# EAGLE board qwiic_blower-Panel (EAGLE 9.5.2)
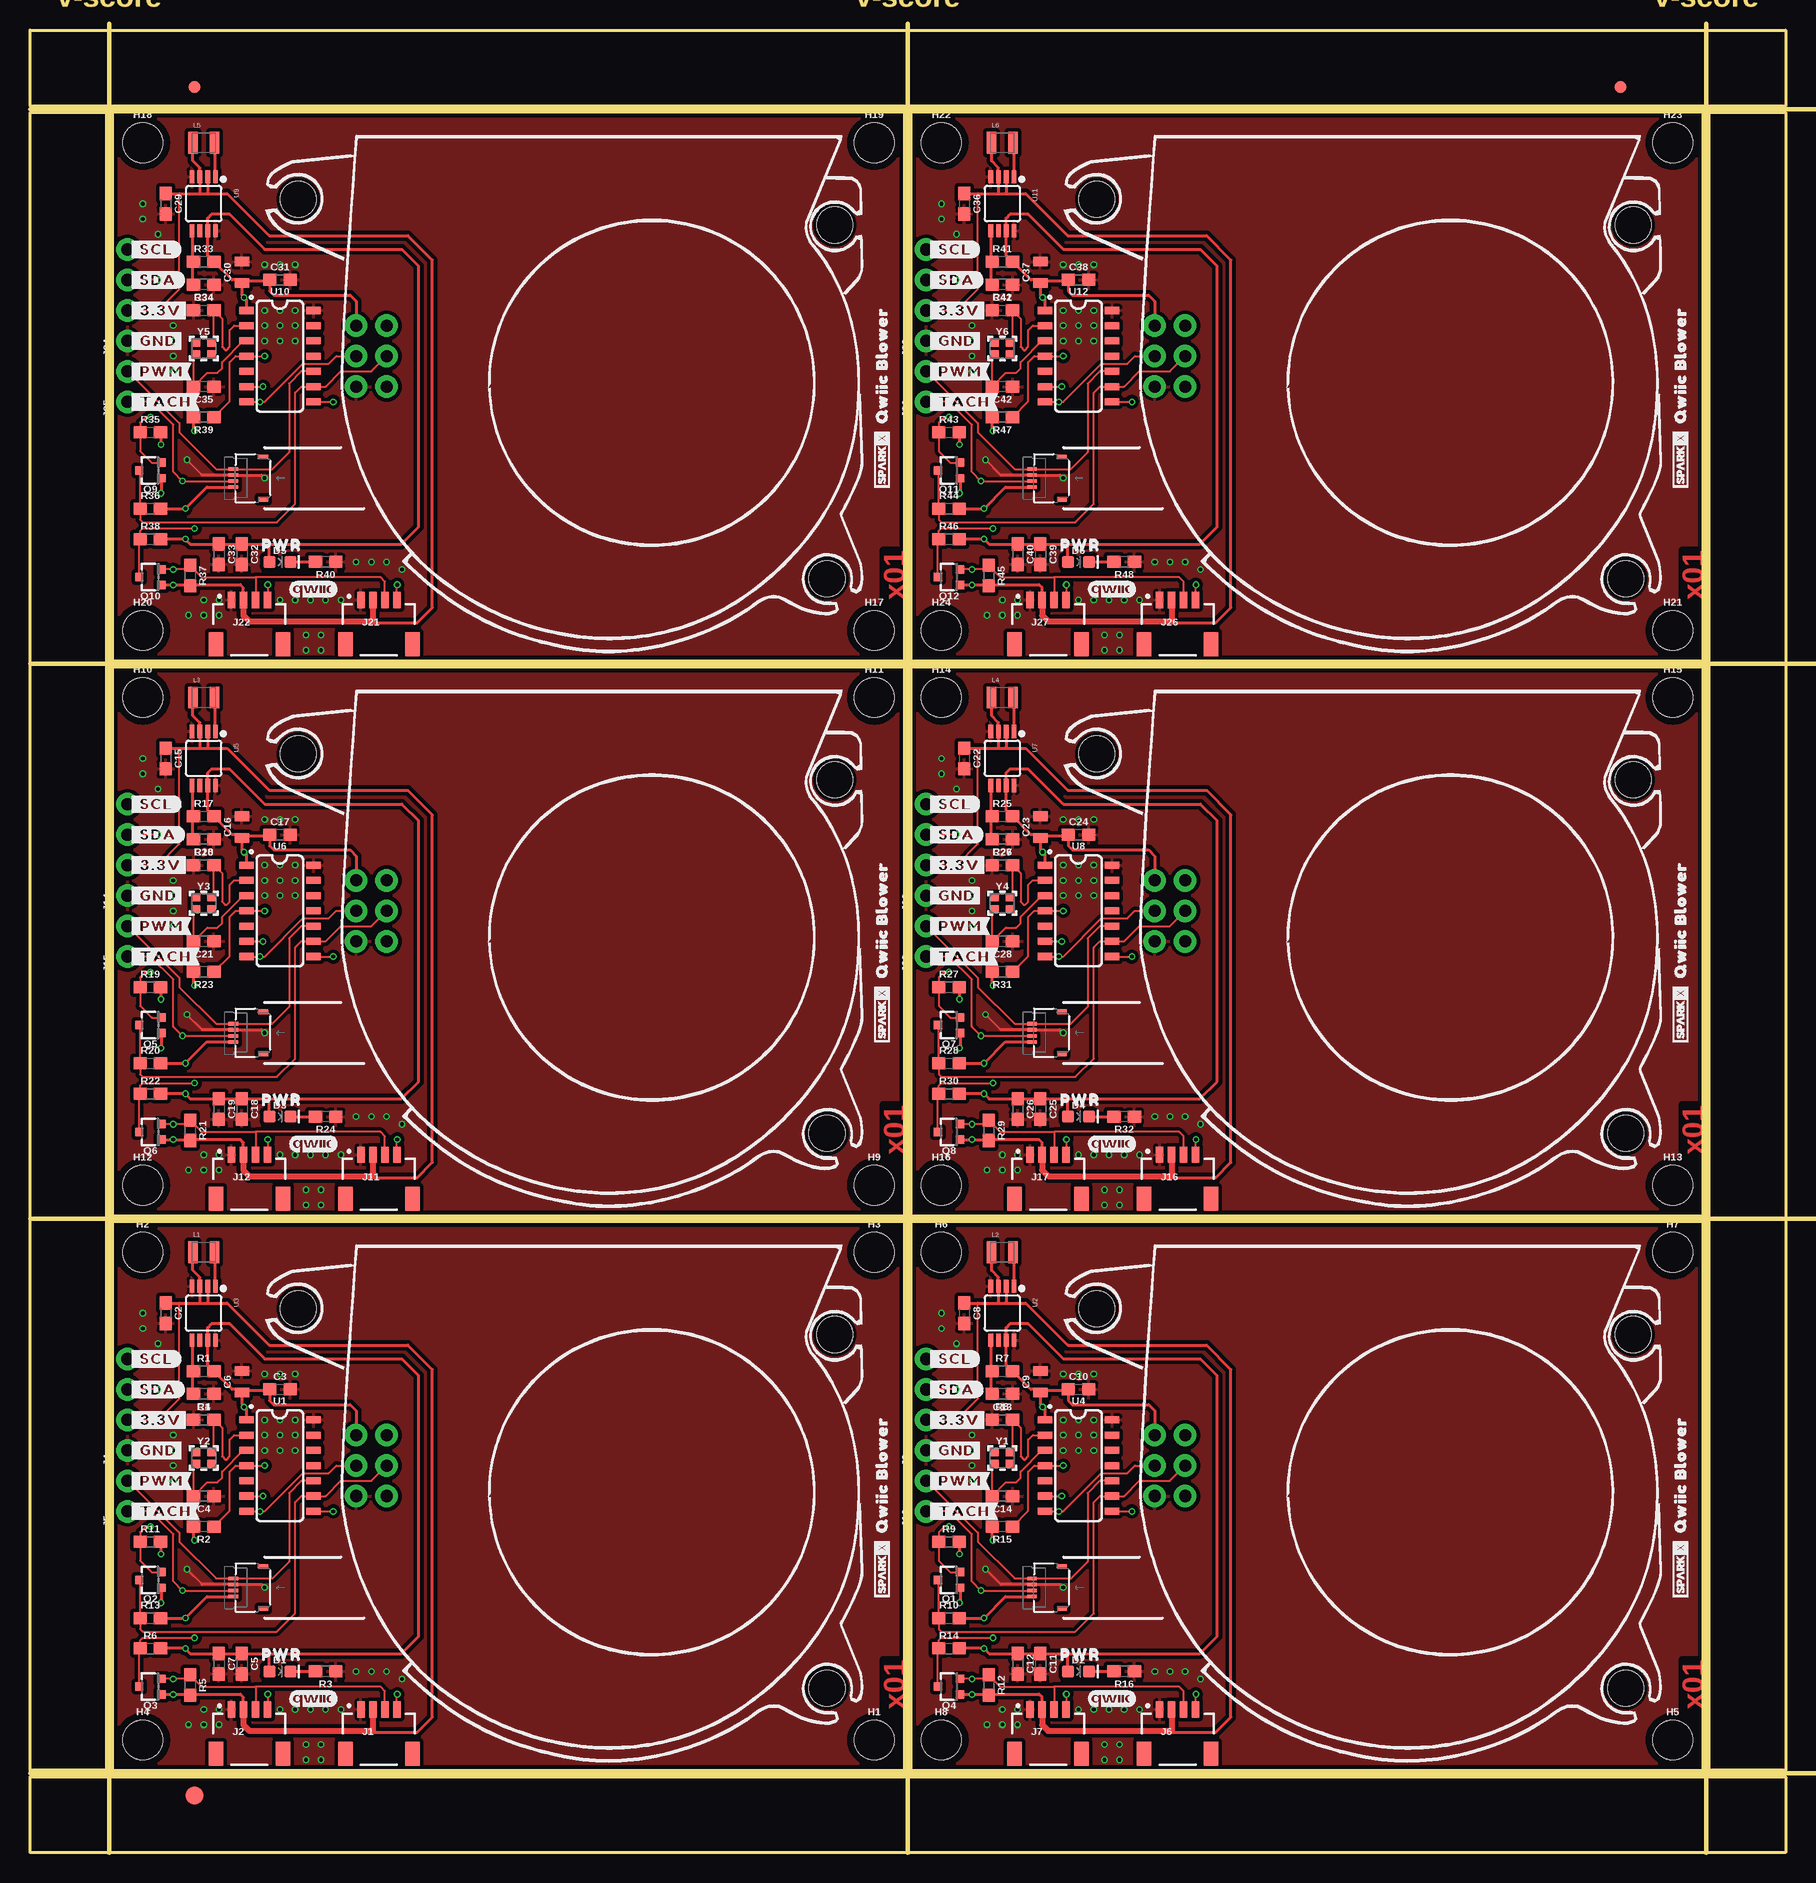
[diagram p0: board, top side]
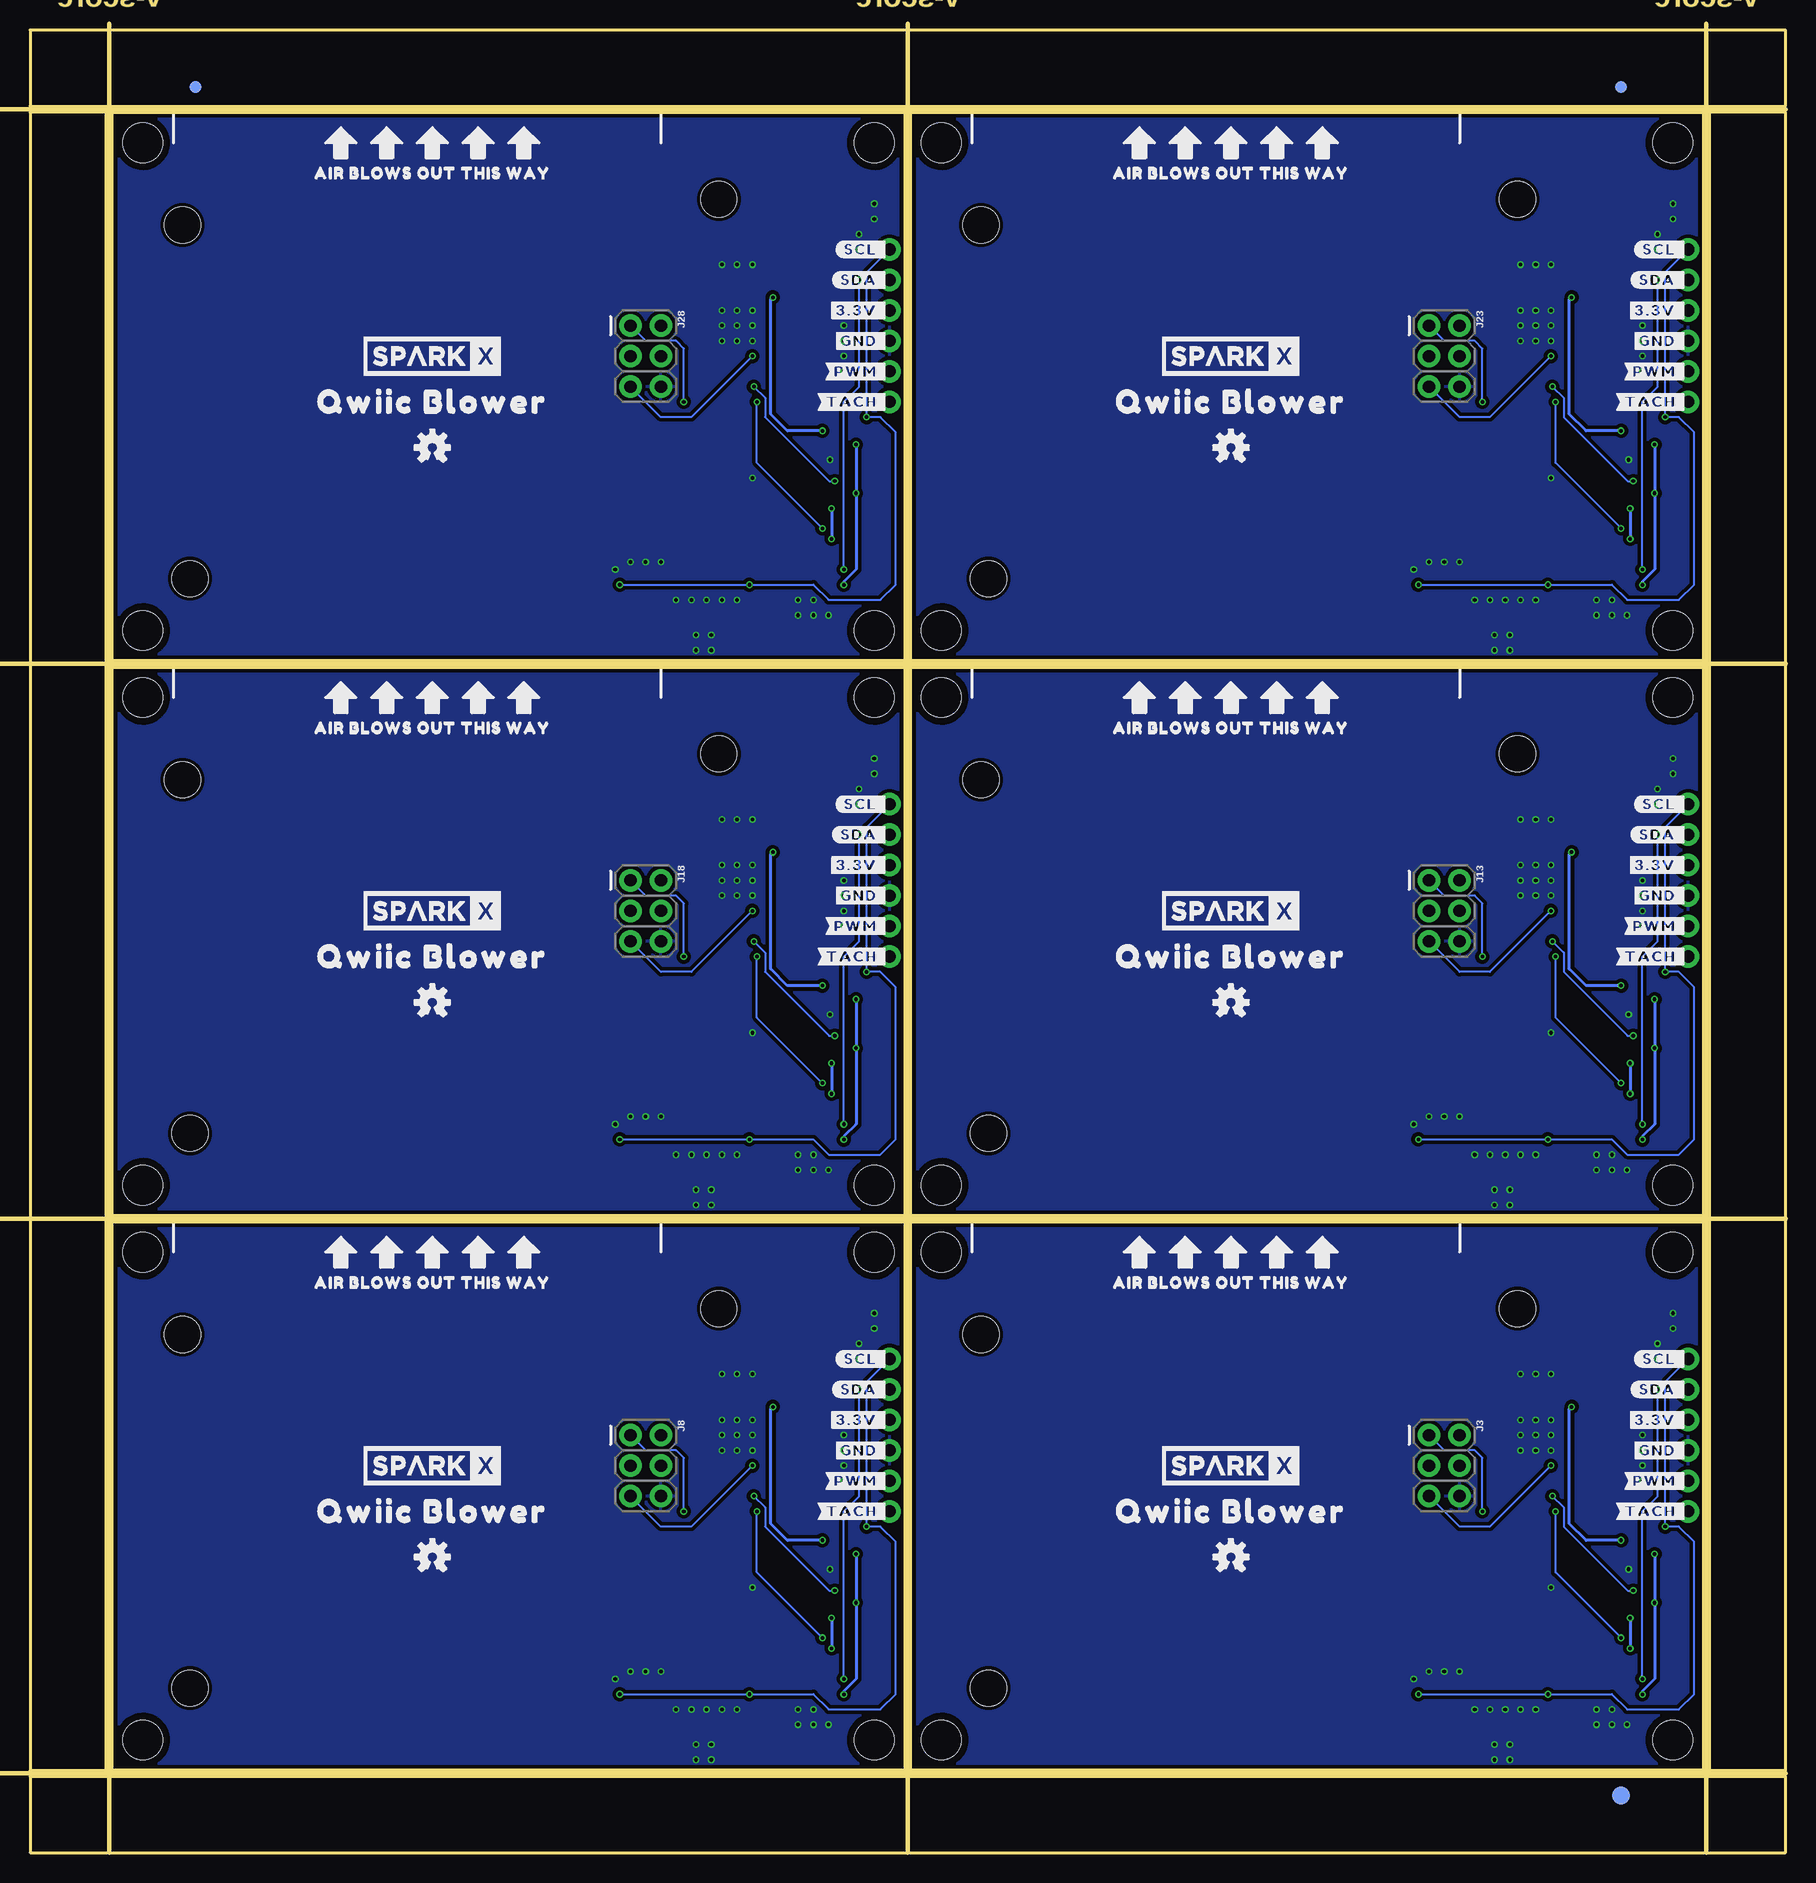
[diagram p1: board, bottom side, seen from below]

Size 146.3 x 151.89 mm. Coordinates in mm from the lower left corner, seen from the top.
Outline: 6.86,6.86 72.9,6.86 72.9,52.58 6.86,52.58 6.86,6.86
Outline: 73.41,6.86 139.45,6.86 139.45,52.58 73.41,52.58 73.41,6.86
Outline: 6.86,53.09 72.9,53.09 72.9,98.81 6.86,98.81 6.86,53.09
Outline: 73.41,53.09 139.45,53.09 139.45,98.81 73.41,98.81 73.41,53.09
Outline: 6.86,99.31 72.9,99.31 72.9,145.03 6.86,145.03 6.86,99.31
Outline: 73.41,99.31 139.45,99.31 139.45,145.03 73.41,145.03 73.41,99.31
Outline: 0,6.35 146.3,6.35 146.3,0 0,0 0,6.35
Outline: 139.95,145.03 146.3,145.03 146.3,6.86 139.95,6.86 139.95,145.03
Outline: 0,151.89 146.3,151.89 146.3,145.54 0,145.54 0,151.89
Outline: 0,145.03 6.35,145.03 6.35,6.86 0,6.86 0,145.03
Copper layers (1*16): Top 0.035mm / dielectric 1.5mm / Bottom 0.035mm
Design rules "qwiic_blower": minimum track width 5mil, minimum drill 0.3mm, track to track 5mil, track to pad 5mil, pad to pad 5mil, via to via 5mil, smd to smd 5mil, copper to edge 7mil, drill to drill 7mil, minimum pad ring 5mil, minimum via ring 5mil, stop-mask expansion 4mil, vias tented up to drill 25mil, thermal gap 10mil
Net classes: 1 power: width 0.203 mm
Milling: 7 lines

## Footprints (pad centres in the part's own frame; a part is rotated, then mirrored left to right if it is on the bottom)
0603 = smd 1.1 x 1: 1 -0.85,0; 2 0.85,0
0805 = smd 0.8 x 1.2: 1 -0.9,0; 2 0.9,0
LED-0603 = smd 1 x 1: A -0.877,0; C 0.877,0
FIDUCIAL-1X2 = smd 1 x 1: 1 0,0
FIDUCIAL-1.5X3 = smd 1.5 x 1.5: 1 0,0
STAND-OFF = hole 3.302: 0,0
JST04_1MM_RA = smd 0.6 x 1.35: 1 -1.5,0; 2 -0.5,0; 3 0.5,0; 4 1.5,0 | smd 1.2 x 2: NC1 2.8,-3.675; NC2 -2.8,-3.675
2X3-NS = drill 1.016 pad 1.88: 1 -2.54,-1.27; 2 -2.54,1.27; 3 0,-1.27; 4 0,1.27; 5 2.54,-1.27; 6 2.54,1.27
1X04_NO_SILK = drill 1.016 pad 1.88: 1 0,0; 2 2.54,0; 3 5.08,0; 4 7.62,0
1X02_NO_SILK = drill 1.016 pad 1.88: 1 0,0; 2 2.54,0
0806 = smd 0.8 x 1.8: 1 -0.9,0; 2 0.9,0
SOT323 = smd 0.7 x 0.7: 1 -0.65,-0.925; 2 0.65,-0.925; 3 0,0.925
SO14 = smd 0.6 x 1.2: 1 -3.81,-2.8; 2 -2.54,-2.8; 3 -1.27,-2.8; 4 0,-2.8; 5 1.27,-2.8; 6 2.54,-2.8; 7 3.81,-2.8; 8 3.81,2.8; 9 2.54,2.8; 10 1.27,2.8; 11 0,2.8; 12 -1.27,2.8; 13 -2.54,2.8; 14 -3.81,2.8
MSOP8 = smd 0.4 x 1.1: 1 -0.975,-2.25; 2 -0.325,-2.25; 3 0.325,-2.25; 4 0.975,-2.25; 5 0.975,2.25; 6 0.325,2.25; 7 -0.325,2.25; 8 -0.975,2.25
FPC_4_0.5MM = smd 0.3 x 0.8: 1 -0.754,1.35; 2 -0.254,1.35; 3 0.254,1.35; 4 0.754,1.35 | smd 0.4 x 0.8: MP1 -1.754,-1.15; MP2 1.754,-1.15 | hole 3: 23.241,-4.064; 21.082,-48.768; -8.382,-48.133
CRYSTAL-SMD-2.0X1.6MM = smd 0.75 x 0.7: 1 -0.675,-0.5; 2 0.675,-0.5; 3 0.675,0.5; 4 -0.675,0.5

## Placement (x,y rotation side)
C1  22pF  [0603]  14.48,36.07 0 top
C2  10uF  [0603]  11.3,44.96 270 top
C3  0.1uF  [0603]  20.83,38.61 0 top
C4  22pF  [0603]  14.48,29.72 180 top
C5  0.1uF  [0603]  17.65,15.75 270 top
C6  22uF  [0805]  17.65,39.24 90 top
C7  1.0uF  [0603]  15.75,15.75 270 top
C8  10uF  [0603]  77.85,44.96 270 top
C9  22uF  [0805]  84.2,39.24 90 top
C10  0.1uF  [0603]  87.38,38.61 0 top
C11  0.1uF  [0603]  84.2,15.75 270 top
C12  1.0uF  [0603]  82.3,15.75 270 top
C13  22pF  [0603]  81.03,36.07 0 top
C14  22pF  [0603]  81.03,29.72 180 top
C15  10uF  [0603]  11.3,91.19 270 top
C16  22uF  [0805]  17.65,85.47 90 top
C17  0.1uF  [0603]  20.83,84.84 0 top
C18  0.1uF  [0603]  17.65,61.98 270 top
C19  1.0uF  [0603]  15.75,61.98 270 top
C20  22pF  [0603]  14.48,82.3 0 top
C21  22pF  [0603]  14.48,75.95 180 top
C22  10uF  [0603]  77.85,91.19 270 top
C23  22uF  [0805]  84.2,85.47 90 top
C24  0.1uF  [0603]  87.38,84.84 0 top
C25  0.1uF  [0603]  84.2,61.98 270 top
C26  1.0uF  [0603]  82.3,61.98 270 top
C27  22pF  [0603]  81.03,82.3 0 top
C28  22pF  [0603]  81.03,75.95 180 top
C29  10uF  [0603]  11.3,137.41 270 top
C30  22uF  [0805]  17.65,131.7 90 top
C31  0.1uF  [0603]  20.83,131.06 0 top
C32  0.1uF  [0603]  17.65,108.2 270 top
C33  1.0uF  [0603]  15.75,108.2 270 top
C34  22pF  [0603]  14.48,128.52 0 top
C35  22pF  [0603]  14.48,122.17 180 top
C36  10uF  [0603]  77.85,137.41 270 top
C37  22uF  [0805]  84.2,131.7 90 top
C38  0.1uF  [0603]  87.38,131.06 0 top
C39  0.1uF  [0603]  84.2,108.2 270 top
C40  1.0uF  [0603]  82.3,108.2 270 top
C41  22pF  [0603]  81.03,128.52 0 top
C42  22pF  [0603]  81.03,122.17 180 top
D1  RED  [LED-0603]  20.83,15.11 0 top
D2  RED  [LED-0603]  87.38,15.11 0 top
D3  RED  [LED-0603]  20.83,61.34 0 top
D4  RED  [LED-0603]  87.38,61.34 0 top
D5  RED  [LED-0603]  20.83,107.57 0 top
D6  RED  [LED-0603]  87.38,107.57 0 top
E$1  [FIDUCIAL-1X2]  13.72,147.13 0 top
E$2  [FIDUCIAL-1X2]  13.72,147.13 0 bottom
E$3  [FIDUCIAL-1X2]  132.52,147.13 0 top
E$4  [FIDUCIAL-1X2]  132.52,147.13 0 bottom
E$5  [FIDUCIAL-1.5X3]  13.72,4.76 0 top
E$6  [FIDUCIAL-1.5X3]  13.72,4.76 0 bottom
H1  STAND-OFF  [STAND-OFF]  70.36,9.4 0 top
H2  STAND-OFF  [STAND-OFF]  9.4,50.04 0 top
H3  STAND-OFF  [STAND-OFF]  70.36,50.04 0 top
H4  STAND-OFF  [STAND-OFF]  9.4,9.4 0 top
H5  STAND-OFF  [STAND-OFF]  136.91,9.4 0 top
H6  STAND-OFF  [STAND-OFF]  75.95,50.04 0 top
H7  STAND-OFF  [STAND-OFF]  136.91,50.04 0 top
H8  STAND-OFF  [STAND-OFF]  75.95,9.4 0 top
H9  STAND-OFF  [STAND-OFF]  70.36,55.63 0 top
H10  STAND-OFF  [STAND-OFF]  9.4,96.27 0 top
H11  STAND-OFF  [STAND-OFF]  70.36,96.27 0 top
H12  STAND-OFF  [STAND-OFF]  9.4,55.63 0 top
H13  STAND-OFF  [STAND-OFF]  136.91,55.63 0 top
H14  STAND-OFF  [STAND-OFF]  75.95,96.27 0 top
H15  STAND-OFF  [STAND-OFF]  136.91,96.27 0 top
H16  STAND-OFF  [STAND-OFF]  75.95,55.63 0 top
H17  STAND-OFF  [STAND-OFF]  70.36,101.85 0 top
H18  STAND-OFF  [STAND-OFF]  9.4,142.49 0 top
H19  STAND-OFF  [STAND-OFF]  70.36,142.49 0 top
H20  STAND-OFF  [STAND-OFF]  9.4,101.85 0 top
H21  STAND-OFF  [STAND-OFF]  136.91,101.85 0 top
H22  STAND-OFF  [STAND-OFF]  75.95,142.49 0 top
H23  STAND-OFF  [STAND-OFF]  136.91,142.49 0 top
H24  STAND-OFF  [STAND-OFF]  75.95,101.85 0 top
J1  QWIIC_RIGHT_ANGLE  [JST04_1MM_RA]  29.08,11.94 0 top
J2  QWIIC_RIGHT_ANGLE  [JST04_1MM_RA]  18.29,11.94 0 top
J3  AVR_SPI_PROG_3X2NS  [2X3-NS]  28.45,32.26 270 bottom
J4  [1X04_NO_SILK]  8.13,33.53 90 top
J5  [1X02_NO_SILK]  8.13,28.45 90 top
J6  QWIIC_RIGHT_ANGLE  [JST04_1MM_RA]  95.63,11.94 0 top
J7  QWIIC_RIGHT_ANGLE  [JST04_1MM_RA]  84.84,11.94 0 top
J8  AVR_SPI_PROG_3X2NS  [2X3-NS]  95,32.26 270 bottom
J9  [1X04_NO_SILK]  74.68,33.53 90 top
J10  [1X02_NO_SILK]  74.68,28.45 90 top
J11  QWIIC_RIGHT_ANGLE  [JST04_1MM_RA]  29.08,58.17 0 top
J12  QWIIC_RIGHT_ANGLE  [JST04_1MM_RA]  18.29,58.17 0 top
J13  AVR_SPI_PROG_3X2NS  [2X3-NS]  28.45,78.49 270 bottom
J14  [1X04_NO_SILK]  8.13,79.76 90 top
J15  [1X02_NO_SILK]  8.13,74.68 90 top
J16  QWIIC_RIGHT_ANGLE  [JST04_1MM_RA]  95.63,58.17 0 top
J17  QWIIC_RIGHT_ANGLE  [JST04_1MM_RA]  84.84,58.17 0 top
J18  AVR_SPI_PROG_3X2NS  [2X3-NS]  95,78.49 270 bottom
J19  [1X04_NO_SILK]  74.68,79.76 90 top
J20  [1X02_NO_SILK]  74.68,74.68 90 top
J21  QWIIC_RIGHT_ANGLE  [JST04_1MM_RA]  29.08,104.39 0 top
J22  QWIIC_RIGHT_ANGLE  [JST04_1MM_RA]  18.29,104.39 0 top
J23  AVR_SPI_PROG_3X2NS  [2X3-NS]  28.45,124.71 270 bottom
J24  [1X04_NO_SILK]  8.13,125.98 90 top
J25  [1X02_NO_SILK]  8.13,120.9 90 top
J26  QWIIC_RIGHT_ANGLE  [JST04_1MM_RA]  95.63,104.39 0 top
J27  QWIIC_RIGHT_ANGLE  [JST04_1MM_RA]  84.84,104.39 0 top
J28  AVR_SPI_PROG_3X2NS  [2X3-NS]  95,124.71 270 bottom
J29  [1X04_NO_SILK]  74.68,125.98 90 top
J30  [1X02_NO_SILK]  74.68,120.9 90 top
L1  2.2μH  [0806]  14.48,50.04 0 top
L2  2.2μH  [0806]  81.03,50.04 0 top
L3  2.2μH  [0806]  14.48,96.27 0 top
L4  2.2μH  [0806]  81.03,96.27 0 top
L5  2.2μH  [0806]  14.48,142.49 0 top
L6  2.2μH  [0806]  81.03,142.49 0 top
Q1  310mA/60V/1.6Ω  [SOT323]  76.58,22.73 90 top
Q2  310mA/60V/1.6Ω  [SOT323]  10.03,22.73 90 top
Q3  310mA/60V/1.6Ω  [SOT323]  10.03,13.84 90 top
Q4  310mA/60V/1.6Ω  [SOT323]  76.58,13.84 90 top
Q5  310mA/60V/1.6Ω  [SOT323]  10.03,68.96 90 top
Q6  310mA/60V/1.6Ω  [SOT323]  10.03,60.07 90 top
Q7  310mA/60V/1.6Ω  [SOT323]  76.58,68.96 90 top
Q8  310mA/60V/1.6Ω  [SOT323]  76.58,60.07 90 top
Q9  310mA/60V/1.6Ω  [SOT323]  10.03,115.19 90 top
Q10  310mA/60V/1.6Ω  [SOT323]  10.03,106.3 90 top
Q11  310mA/60V/1.6Ω  [SOT323]  76.58,115.19 90 top
Q12  310mA/60V/1.6Ω  [SOT323]  76.58,106.3 90 top
R1  750K  [0603]  14.48,40.13 0 top
R2  10k  [0603]  14.48,27.18 180 top
R3  1k  [0603]  24.64,15.11 180 top
R4  100k  [0603]  14.48,38.23 180 top
R5  2.2k  [0603]  13.34,13.97 270 top
R6  2.2k  [0603]  10.03,17.02 0 top
R7  750K  [0603]  81.03,40.13 0 top
R8  100k  [0603]  81.03,38.23 180 top
R9  2.2k  [0603]  76.58,25.91 0 top
R10  2.2k  [0603]  76.58,19.56 0 top
R11  2.2k  [0603]  10.03,25.91 0 top
R12  2.2k  [0603]  79.88,13.97 270 top
R13  2.2k  [0603]  10.03,19.56 0 top
R14  2.2k  [0603]  76.58,17.02 0 top
R15  10k  [0603]  81.03,27.18 180 top
R16  1k  [0603]  91.19,15.11 180 top
R17  750K  [0603]  14.48,86.36 0 top
R18  100k  [0603]  14.48,84.45 180 top
R19  2.2k  [0603]  10.03,72.14 0 top
R20  2.2k  [0603]  10.03,65.79 0 top
R21  2.2k  [0603]  13.34,60.2 270 top
R22  2.2k  [0603]  10.03,63.25 0 top
R23  10k  [0603]  14.48,73.41 180 top
R24  1k  [0603]  24.64,61.34 180 top
R25  750K  [0603]  81.03,86.36 0 top
R26  100k  [0603]  81.03,84.45 180 top
R27  2.2k  [0603]  76.58,72.14 0 top
R28  2.2k  [0603]  76.58,65.79 0 top
R29  2.2k  [0603]  79.88,60.2 270 top
R30  2.2k  [0603]  76.58,63.25 0 top
R31  10k  [0603]  81.03,73.41 180 top
R32  1k  [0603]  91.19,61.34 180 top
R33  750K  [0603]  14.48,132.59 0 top
R34  100k  [0603]  14.48,130.68 180 top
R35  2.2k  [0603]  10.03,118.36 0 top
R36  2.2k  [0603]  10.03,112.01 0 top
R37  2.2k  [0603]  13.34,106.43 270 top
R38  2.2k  [0603]  10.03,109.47 0 top
R39  10k  [0603]  14.48,119.63 180 top
R40  1k  [0603]  24.64,107.57 180 top
R41  750K  [0603]  81.03,132.59 0 top
R42  100k  [0603]  81.03,130.68 180 top
R43  2.2k  [0603]  76.58,118.36 0 top
R44  2.2k  [0603]  76.58,112.01 0 top
R45  2.2k  [0603]  79.88,106.43 270 top
R46  2.2k  [0603]  76.58,109.47 0 top
R47  10k  [0603]  81.03,119.63 180 top
R48  1k  [0603]  91.19,107.57 180 top
U1  ATtiny841  [SO14]  20.83,32.26 270 top
U2  PAM2401  [MSOP8]  81.03,44.96 180 top
U3  PAM2401  [MSOP8]  14.48,44.96 180 top
U4  ATtiny841  [SO14]  87.38,32.26 270 top
U5  PAM2401  [MSOP8]  14.48,91.19 180 top
U6  ATtiny841  [SO14]  20.83,78.49 270 top
U7  PAM2401  [MSOP8]  81.03,91.19 180 top
U8  ATtiny841  [SO14]  87.38,78.49 270 top
U9  PAM2401  [MSOP8]  14.48,137.41 180 top
U10  ATtiny841  [SO14]  20.83,124.71 270 top
U11  PAM2401  [MSOP8]  81.03,137.41 180 top
U12  ATtiny841  [SO14]  87.38,124.71 270 top
U$1  [#_TACH#0]  8.13,28.45 0 top
U$2  [#_PWM#0]  8.13,30.99 0 top
U$3  [#_GND#0]  8.13,33.53 0 top
U$4  [#_3#3V#0]  8.13,36.07 0 top
U$5  [#_SDA#0]  8.13,38.61 0 top
U$6  [#_SCL#0]  8.13,41.15 0 top
U$7  [#SCL_#0]  8.13,41.15 0 bottom
U$8  [#SDA_#0]  8.13,38.61 0 bottom
U$9  [#3#3V_#0]  8.13,36.07 0 bottom
U$10  [#GND_#0]  8.13,33.53 0 bottom
U$11  [#PWM_#0]  8.13,30.99 0 bottom
U$12  [#TACH_#0]  8.13,28.45 0 bottom
U$13  [QWIIC_4MM]  23.62,12.83 0 top
U$14  [QWIIC_BLOWER0]  70.99,31.5 90 top
U$15  [SPARKX-TINY]  70.99,23.62 90 top
U$16  [AIR_BLOWS_OUT_THIS_WAY0]  46.23,47.5 0 bottom
U$17  [_QWIIC_BLOWER_0]  46.23,28.45 0 bottom
U$18  [SPARKX-LARGE]  46.23,32.26 0 bottom
U$19  NINTENDO_SWITCH_FAN  [FPC_4_0.5MM]  18.29,22.1 90 top
U$20  [OSHW-LOGO-S]  46.23,24.64 0 bottom
U$21  [PWR0]  20.95,16.51 0 top
U$22  [#_TACH#0]  74.68,28.45 0 top
U$23  [#_PWM#0]  74.68,30.99 0 top
U$24  [#_GND#0]  74.68,33.53 0 top
U$25  [#_3#3V#0]  74.68,36.07 0 top
U$26  [#_SDA#0]  74.68,38.61 0 top
U$27  [#_SCL#0]  74.68,41.15 0 top
U$28  [#SCL_#0]  74.68,41.15 0 bottom
U$29  [#SDA_#0]  74.68,38.61 0 bottom
U$30  [#3#3V_#0]  74.68,36.07 0 bottom
U$31  [#GND_#0]  74.68,33.53 0 bottom
U$32  [#PWM_#0]  74.68,30.99 0 bottom
U$33  [#TACH_#0]  74.68,28.45 0 bottom
U$34  [QWIIC_4MM]  90.17,12.83 0 top
U$35  [QWIIC_BLOWER0]  137.54,31.5 90 top
U$36  [SPARKX-TINY]  137.54,23.62 90 top
U$37  [AIR_BLOWS_OUT_THIS_WAY0]  112.78,47.5 0 bottom
U$38  [_QWIIC_BLOWER_0]  112.78,28.45 0 bottom
U$39  [SPARKX-LARGE]  112.78,32.26 0 bottom
U$40  NINTENDO_SWITCH_FAN  [FPC_4_0.5MM]  84.84,22.1 90 top
U$41  [OSHW-LOGO-S]  112.78,24.64 0 bottom
U$42  [PWR0]  87.5,16.51 0 top
U$43  [#_TACH#0]  8.13,74.68 0 top
U$44  [#_PWM#0]  8.13,77.22 0 top
U$45  [#_GND#0]  8.13,79.76 0 top
U$46  [#_3#3V#0]  8.13,82.3 0 top
U$47  [#_SDA#0]  8.13,84.84 0 top
U$48  [#_SCL#0]  8.13,87.38 0 top
U$49  [#SCL_#0]  8.13,87.38 0 bottom
U$50  [#SDA_#0]  8.13,84.84 0 bottom
U$51  [#3#3V_#0]  8.13,82.3 0 bottom
U$52  [#GND_#0]  8.13,79.76 0 bottom
U$53  [#PWM_#0]  8.13,77.22 0 bottom
U$54  [#TACH_#0]  8.13,74.68 0 bottom
U$55  [QWIIC_4MM]  23.62,59.05 0 top
U$56  [QWIIC_BLOWER0]  70.99,77.72 90 top
U$57  [SPARKX-TINY]  70.99,69.85 90 top
U$58  [AIR_BLOWS_OUT_THIS_WAY0]  46.23,93.73 0 bottom
U$59  [_QWIIC_BLOWER_0]  46.23,74.68 0 bottom
U$60  [SPARKX-LARGE]  46.23,78.49 0 bottom
U$61  NINTENDO_SWITCH_FAN  [FPC_4_0.5MM]  18.29,68.33 90 top
U$62  [OSHW-LOGO-S]  46.23,70.87 0 bottom
U$63  [PWR0]  20.95,62.74 0 top
U$64  [#_TACH#0]  74.68,74.68 0 top
U$65  [#_PWM#0]  74.68,77.22 0 top
U$66  [#_GND#0]  74.68,79.76 0 top
U$67  [#_3#3V#0]  74.68,82.3 0 top
U$68  [#_SDA#0]  74.68,84.84 0 top
U$69  [#_SCL#0]  74.68,87.38 0 top
U$70  [#SCL_#0]  74.68,87.38 0 bottom
U$71  [#SDA_#0]  74.68,84.84 0 bottom
U$72  [#3#3V_#0]  74.68,82.3 0 bottom
U$73  [#GND_#0]  74.68,79.76 0 bottom
U$74  [#PWM_#0]  74.68,77.22 0 bottom
U$75  [#TACH_#0]  74.68,74.68 0 bottom
U$76  [QWIIC_4MM]  90.17,59.05 0 top
U$77  [QWIIC_BLOWER0]  137.54,77.72 90 top
U$78  [SPARKX-TINY]  137.54,69.85 90 top
U$79  [AIR_BLOWS_OUT_THIS_WAY0]  112.78,93.73 0 bottom
U$80  [_QWIIC_BLOWER_0]  112.78,74.68 0 bottom
U$81  [SPARKX-LARGE]  112.78,78.49 0 bottom
U$82  NINTENDO_SWITCH_FAN  [FPC_4_0.5MM]  84.84,68.33 90 top
U$83  [OSHW-LOGO-S]  112.78,70.87 0 bottom
U$84  [PWR0]  87.5,62.74 0 top
U$85  [#_TACH#0]  8.13,120.9 0 top
U$86  [#_PWM#0]  8.13,123.44 0 top
U$87  [#_GND#0]  8.13,125.98 0 top
U$88  [#_3#3V#0]  8.13,128.52 0 top
U$89  [#_SDA#0]  8.13,131.06 0 top
U$90  [#_SCL#0]  8.13,133.6 0 top
U$91  [#SCL_#0]  8.13,133.6 0 bottom
U$92  [#SDA_#0]  8.13,131.06 0 bottom
U$93  [#3#3V_#0]  8.13,128.52 0 bottom
U$94  [#GND_#0]  8.13,125.98 0 bottom
U$95  [#PWM_#0]  8.13,123.44 0 bottom
U$96  [#TACH_#0]  8.13,120.9 0 bottom
U$97  [QWIIC_4MM]  23.62,105.28 0 top
U$98  [QWIIC_BLOWER0]  70.99,123.95 90 top
U$99  [SPARKX-TINY]  70.99,116.08 90 top
U$100  [AIR_BLOWS_OUT_THIS_WAY0]  46.23,139.95 0 bottom
U$101  [_QWIIC_BLOWER_0]  46.23,120.9 0 bottom
U$102  [SPARKX-LARGE]  46.23,124.71 0 bottom
U$103  NINTENDO_SWITCH_FAN  [FPC_4_0.5MM]  18.29,114.55 90 top
U$104  [OSHW-LOGO-S]  46.23,117.09 0 bottom
U$105  [PWR0]  20.95,108.97 0 top
U$106  [#_TACH#0]  74.68,120.9 0 top
U$107  [#_PWM#0]  74.68,123.44 0 top
U$108  [#_GND#0]  74.68,125.98 0 top
U$109  [#_3#3V#0]  74.68,128.52 0 top
U$110  [#_SDA#0]  74.68,131.06 0 top
U$111  [#_SCL#0]  74.68,133.6 0 top
U$112  [#SCL_#0]  74.68,133.6 0 bottom
U$113  [#SDA_#0]  74.68,131.06 0 bottom
U$114  [#3#3V_#0]  74.68,128.52 0 bottom
U$115  [#GND_#0]  74.68,125.98 0 bottom
U$116  [#PWM_#0]  74.68,123.44 0 bottom
U$117  [#TACH_#0]  74.68,120.9 0 bottom
U$118  [QWIIC_4MM]  90.17,105.28 0 top
U$119  [QWIIC_BLOWER0]  137.54,123.95 90 top
U$120  [SPARKX-TINY]  137.54,116.08 90 top
U$121  [AIR_BLOWS_OUT_THIS_WAY0]  112.78,139.95 0 bottom
U$122  [_QWIIC_BLOWER_0]  112.78,120.9 0 bottom
U$123  [SPARKX-LARGE]  112.78,124.71 0 bottom
U$124  NINTENDO_SWITCH_FAN  [FPC_4_0.5MM]  84.84,114.55 90 top
U$125  [OSHW-LOGO-S]  112.78,117.09 0 bottom
U$126  [PWR0]  87.5,108.97 0 top
Y1  16MHz  [CRYSTAL-SMD-2.0X1.6MM]  81.03,32.89 0 top
Y2  16MHz  [CRYSTAL-SMD-2.0X1.6MM]  14.48,32.89 0 top
Y3  16MHz  [CRYSTAL-SMD-2.0X1.6MM]  14.48,79.12 0 top
Y4  16MHz  [CRYSTAL-SMD-2.0X1.6MM]  81.03,79.12 0 top
Y5  16MHz  [CRYSTAL-SMD-2.0X1.6MM]  14.48,125.35 0 top
Y6  16MHz  [CRYSTAL-SMD-2.0X1.6MM]  81.03,125.35 0 top

## Library data of the parts
C1 C4 C13 C14 C20 C21 C27 C28 C34 C35 C41 C42 = SparkFun-Capacitors; PROD_ID: CAP-07876
C2 C8 C15 C22 C29 C36 = SparkFun-Capacitors; PROD_ID: CAP-11015
C3 C5 C10 C11 C17 C18 C24 C25 C31 C32 C38 C39 = SparkFun-Capacitors; PROD_ID: CAP-00810
C6 C9 C16 C23 C30 C37 = SparkFun-Capacitors; PROD_ID: CAP-08402
C7 C12 C19 C26 C33 C40 = SparkFun-Capacitors; PROD_ID: CAP-00868
D1-D6 = SparkFun-LED; PROD_ID: DIO-00819
E$1-E$4 U$13 U$20 U$34 U$41 U$55 U$62 U$76 U$83 U$97 U$104 U$118 U$125 = SparkFun-Aesthetics
E$5 E$6 = SparkFun-Retired
H1-H24 = SparkFun-Hardware
J1 J2 J6 J7 J11 J12 J16 J17 J21 J22 J26 J27 = SparkFun-Connectors; PROD_ID: CONN-13694
J3-J5 J8-J10 J13-J15 J18-J20 J23-J25 J28-J30 U$19 U$40 U$61 U$82 U$103 U$124 = SparkFun-Connectors
L1-L6 = SparkFun-Coils; PROD_ID: NDUC-14257
Q1-Q12 = SparkFun-DiscreteSemi; PROD_ID: TRANS-11151
R1 R7 R17 R25 R33 R41 = SparkFun-Resistors; PROD_ID: RES-13768
R2 R15 R23 R31 R39 R47 = SparkFun-Resistors; PROD_ID: RES-00824
R3 R16 R24 R32 R40 R48 = SparkFun-Resistors; PROD_ID: RES-07856
R4 R8 R18 R26 R34 R42 = SparkFun-Resistors; PROD_ID: RES-07828
R5 R6 R9-R14 R19-R22 R27-R30 R35-R38 R43-R46 = SparkFun-Resistors; PROD_ID: RES-08272
U1 U4 U6 U8 U10 U12 = SparkFun-IC-Microcontroller; PROD_ID: IC-14692
U2 U3 U5 U7 U9 U11 = SparkFun-IC-Power; PROD_ID: IC-13769
U$1-U$12 U$14 U$16 U$17 U$21-U$33 U$35 U$37 U$38 U$42-U$54 U$56 U$58 U$59 U$63-U$75 U$77 U$79 U$80 U$84-U$96 U$98 U$100 U$101 U$105-U$117 U$119 U$121 U$122 U$126 = output
U$15 U$18 U$36 U$39 U$57 U$60 U$78 U$81 U$99 U$102 U$120 U$123 = SparkX
Y1-Y6 = SparkFun-Clocks; PROD_ID: XTAL-14681

## Nets
3.3V: C2.1 J1.2 J2.2 J4.2 L1.1 Q2.1 Q3.1 R5.2 R11.2 U3.2 U3.3
3.3V1: C8.1 J6.2 J7.2 J9.2 L2.1 Q1.1 Q4.1 R9.2 R12.2 U2.2 U2.3
3.3V2: C15.1 J11.2 J12.2 J14.2 L3.1 Q5.1 Q6.1 R19.2 R21.2 U5.2 U5.3
3.3V3: C22.1 J16.2 J17.2 J19.2 L4.1 Q7.1 Q8.1 R27.2 R29.2 U7.2 U7.3
3.3V4: C29.1 J21.2 J22.2 J24.2 L5.1 Q9.1 Q10.1 R35.2 R37.2 U9.2 U9.3
3.3V5: C36.1 J26.2 J27.2 J29.2 L6.1 Q11.1 Q12.1 R43.2 R45.2 U11.2 U11.3
5V: C3.1 C5.1 C6.1 C7.1 D1.A J3.2 R1.2 R2.2 R6.2 R13.2 U1.1 U3.7 U$19.1
5V1: C9.1 C10.1 C11.1 C12.1 D2.A J8.2 R7.2 R10.2 R14.2 R15.2 U2.7 U4.1 U$40.1
5V2: C16.1 C17.1 C18.1 C19.1 D3.A J13.2 R17.2 R20.2 R22.2 R23.2 U5.7 U6.1 U$61.1
5V3: C23.1 C24.1 C25.1 C26.1 D4.A J18.2 R25.2 R28.2 R30.2 R31.2 U7.7 U8.1 U$82.1
5V4: C30.1 C31.1 C32.1 C33.1 D5.A J23.2 R33.2 R36.2 R38.2 R39.2 U9.7 U10.1 U$103.1
5V5: C37.1 C38.1 C39.1 C40.1 D6.A J28.2 R41.2 R44.2 R46.2 R47.2 U11.7 U12.1 U$124.1
25KHZ_PWM: J5.2 U1.10 U$19.4
25KHZ_PWM1: J10.2 U4.10 U$40.4
25KHZ_PWM2: J15.2 U6.10 U$61.4
25KHZ_PWM3: J20.2 U8.10 U$82.4
25KHZ_PWM4: J25.2 U10.10 U$103.4
25KHZ_PWM5: J30.2 U12.10 U$124.4
!RST: J3.5 R2.1 U1.4
!RST1: J8.5 R15.1 U4.4
!RST2: J13.5 R23.1 U6.4
!RST3: J18.5 R31.1 U8.4
!RST4: J23.5 R39.1 U10.4
!RST5: J28.5 R47.1 U12.4
CIPO: J3.1 U1.8
CIPO1: J8.1 U4.8
CIPO2: J13.1 U6.8
CIPO3: J18.1 U8.8
CIPO4: J23.1 U10.8
CIPO5: J28.1 U12.8
FAN_TACH: J5.1 U1.6 U$19.2
FAN_TACH1: J10.1 U4.6 U$40.2
FAN_TACH2: J15.1 U6.6 U$61.2
FAN_TACH3: J20.1 U8.6 U$82.2
FAN_TACH4: J25.1 U10.6 U$103.2
FAN_TACH5: J30.1 U12.6 U$124.2
GND [power]: C1.1 C2.2 C3.2 C4.1 C5.2 C6.2 C7.2 J1.1 J2.1 J3.6 J4.1 R3.1 R4.1 U1.14 U3.4 U3.8 U$19.3
GND1 [power]: C8.2 C9.2 C10.2 C11.2 C12.2 C13.1 C14.1 J6.1 J7.1 J8.6 J9.1 R8.1 R16.1 U2.4 U2.8 U4.14 U$40.3
GND2 [power]: C15.2 C16.2 C17.2 C18.2 C19.2 C20.1 C21.1 J11.1 J12.1 J13.6 J14.1 R18.1 R24.1 U5.4 U5.8 U6.14 U$61.3
GND3 [power]: C22.2 C23.2 C24.2 C25.2 C26.2 C27.1 C28.1 J16.1 J17.1 J18.6 J19.1 R26.1 R32.1 U7.4 U7.8 U8.14 U$82.3
GND4 [power]: C29.2 C30.2 C31.2 C32.2 C33.2 C34.1 C35.1 J21.1 J22.1 J23.6 J24.1 R34.1 R40.1 U9.4 U9.8 U10.14 U$103.3
GND5 [power]: C36.2 C37.2 C38.2 C39.2 C40.2 C41.1 C42.1 J26.1 J27.1 J28.6 J29.1 R42.1 R48.1 U11.4 U11.8 U12.14 U$124.3
HV_SCL: J3.3 Q2.3 R13.1 U1.9
HV_SCL1: J8.3 Q1.3 R10.1 U4.9
HV_SCL2: J13.3 Q5.3 R20.1 U6.9
HV_SCL3: J18.3 Q7.3 R28.1 U8.9
HV_SCL4: J23.3 Q9.3 R36.1 U10.9
HV_SCL5: J28.3 Q11.3 R44.1 U12.9
HV_SDA: J3.4 Q3.3 R6.1 U1.7
HV_SDA1: J8.4 Q4.3 R14.1 U4.7
HV_SDA2: J13.4 Q6.3 R22.1 U6.7
HV_SDA3: J18.4 Q8.3 R30.1 U8.7
HV_SDA4: J23.4 Q10.3 R38.1 U10.7
HV_SDA5: J28.4 Q12.3 R46.1 U12.7
N$1: C4.2 U1.3 Y2.1
N$2: R1.1 R4.2 U3.5
N$3: L1.2 U3.1
N$4: C1.2 U1.2 Y2.3
N$5: D1.C R3.2
N$6: R7.1 R8.2 U2.5
N$7: L2.2 U2.1
N$8: C14.2 U4.3 Y1.1
N$9: C13.2 U4.2 Y1.3
N$10: D2.C R16.2
N$11: R17.1 R18.2 U5.5
N$12: L3.2 U5.1
N$13: C21.2 U6.3 Y3.1
N$14: C20.2 U6.2 Y3.3
N$15: D3.C R24.2
N$16: R25.1 R26.2 U7.5
N$17: L4.2 U7.1
N$18: C28.2 U8.3 Y4.1
N$19: C27.2 U8.2 Y4.3
N$20: D4.C R32.2
N$21: R33.1 R34.2 U9.5
N$22: L5.2 U9.1
N$23: C35.2 U10.3 Y5.1
N$24: C34.2 U10.2 Y5.3
N$25: D5.C R40.2
N$26: R41.1 R42.2 U11.5
N$27: L6.2 U11.1
N$28: C42.2 U12.3 Y6.1
N$29: C41.2 U12.2 Y6.3
N$30: D6.C R48.2
SCL: J1.4 J2.4 J4.4 Q2.2 R11.1
SCL1: J6.4 J7.4 J9.4 Q1.2 R9.1
SCL2: J11.4 J12.4 J14.4 Q5.2 R19.1
SCL3: J16.4 J17.4 J19.4 Q7.2 R27.1
SCL4: J21.4 J22.4 J24.4 Q9.2 R35.1
SCL5: J26.4 J27.4 J29.4 Q11.2 R43.1
SDA: J1.3 J2.3 J4.3 Q3.2 R5.1
SDA1: J6.3 J7.3 J9.3 Q4.2 R12.1
SDA2: J11.3 J12.3 J14.3 Q6.2 R21.1
SDA3: J16.3 J17.3 J19.3 Q8.2 R29.1
SDA4: J21.3 J22.3 J24.3 Q10.2 R37.1
SDA5: J26.3 J27.3 J29.3 Q12.2 R45.1

## Tracks (layer width: path | path; a pad name or v marks a point on that pad's centre or on a via)
3.3V  (via drill 0.3)
  Top 0.152: J4.2 10.67,36.07 12.45,37.85 12.45,45.81
  Top 0.254: L1.1 13.58,48.52 14.15,47.95 U3.3 14.15,45.88 14.22,45.81 | 28.58,10.17 28.72,10.03 32.26,10.03 33.53,11.3 33.53,40.26 31.5,42.29 19.94,42.29 16.42,45.81 14.9,45.81 | J2.2 17.79,12.95 17.53,13.21 13.42,13.21 R5.2 13.26,13.19 v11.94,13.19 Q3.1 | C2.1 12.45,45.81 14.22,45.81 | 14.22,45.81 14.9,45.81 | U3.2 14.8,45.9 14.9,45.81 | Q2.1 10.96,20.86 v10.92,20.83 | R11.2 10.88,24.93 v10.92,24.89
  Top 0.508: J2.2 17.79,10.66 18.29,10.16 28.57,10.16 28.58,10.17 J1.2
  Bottom 0.254: v11.94,13.19 11.94,13.46 10.92,14.48 v10.92,20.83 v10.92,24.89
3.3V1  (via drill 0.3)
  Top 0.152: J9.2 77.22,36.07 78.99,37.85 78.99,45.81
  Top 0.254: L2.1 80.13,48.52 80.7,47.95 U2.3 80.7,45.88 80.77,45.81 | 95.13,10.17 95.27,10.03 98.81,10.03 100.08,11.3 100.08,40.26 98.04,42.29 86.49,42.29 82.97,45.81 81.45,45.81 | J7.2 84.34,12.95 84.07,13.21 79.97,13.21 R12.2 79.81,13.19 v78.49,13.19 Q4.1 | C8.1 78.99,45.81 80.77,45.81 | 80.77,45.81 81.45,45.81 | U2.2 81.35,45.9 81.45,45.81 | Q1.1 77.51,20.86 v77.47,20.83 | R9.2 77.43,24.93 v77.47,24.89
  Top 0.508: J7.2 84.34,10.66 84.84,10.16 95.12,10.16 95.13,10.17 J6.2
  Bottom 0.254: v78.49,13.19 78.49,13.46 77.47,14.48 v77.47,20.83 v77.47,24.89
3.3V2  (via drill 0.3)
  Top 0.152: J14.2 10.67,82.3 12.45,84.07 12.45,92.04
  Top 0.254: L3.1 13.58,94.75 14.15,94.18 U5.3 14.15,92.11 14.22,92.04 | 28.58,56.4 28.72,56.26 32.26,56.26 33.53,57.53 33.53,86.49 31.5,88.52 19.94,88.52 16.42,92.04 14.9,92.04 | J12.2 17.79,59.17 17.53,59.44 13.42,59.44 R21.2 13.26,59.42 v11.94,59.42 Q6.1 | C15.1 12.45,92.04 14.22,92.04 | 14.22,92.04 14.9,92.04 | U5.2 14.8,92.13 14.9,92.04 | Q5.1 10.96,67.09 v10.92,67.06 | R19.2 10.88,71.16 v10.92,71.12
  Top 0.508: J12.2 17.79,56.89 18.29,56.39 28.57,56.39 28.58,56.4 J11.2
  Bottom 0.254: v11.94,59.42 11.94,59.69 10.92,60.71 v10.92,67.06 v10.92,71.12
3.3V3  (via drill 0.3)
  Top 0.152: J19.2 77.22,82.3 78.99,84.07 78.99,92.04
  Top 0.254: L4.1 80.13,94.75 80.7,94.18 U7.3 80.7,92.11 80.77,92.04 | 95.13,56.4 95.27,56.26 98.81,56.26 100.08,57.53 100.08,86.49 98.04,88.52 86.49,88.52 82.97,92.04 81.45,92.04 | J17.2 84.34,59.17 84.07,59.44 79.97,59.44 R29.2 79.81,59.42 v78.49,59.42 Q8.1 | C22.1 78.99,92.04 80.77,92.04 | 80.77,92.04 81.45,92.04 | U7.2 81.35,92.13 81.45,92.04 | Q7.1 77.51,67.09 v77.47,67.06 | R27.2 77.43,71.16 v77.47,71.12
  Top 0.508: J17.2 84.34,56.89 84.84,56.39 95.12,56.39 95.13,56.4 J16.2
  Bottom 0.254: v78.49,59.42 78.49,59.69 77.47,60.71 v77.47,67.06 v77.47,71.12
3.3V4  (via drill 0.3)
  Top 0.152: J24.2 10.67,128.52 12.45,130.3 12.45,138.26
  Top 0.254: L5.1 13.58,140.98 14.15,140.41 U9.3 14.15,138.34 14.22,138.26 | 28.58,102.62 28.72,102.49 32.26,102.49 33.53,103.76 33.53,132.72 31.5,134.75 19.94,134.75 16.42,138.26 14.9,138.26 | J22.2 17.79,105.4 17.53,105.66 13.42,105.66 R37.2 13.26,105.65 v11.94,105.65 Q10.1 | C29.1 12.45,138.26 14.22,138.26 | 14.22,138.26 14.9,138.26 | U9.2 14.8,138.36 14.9,138.26 | Q9.1 10.96,113.32 v10.92,113.28 | R35.2 10.88,117.39 v10.92,117.35
  Top 0.508: J22.2 17.79,103.12 18.29,102.62 28.57,102.62 28.58,102.62 J21.2
  Bottom 0.254: v11.94,105.65 11.94,105.92 10.92,106.93 v10.92,113.28 v10.92,117.35
3.3V5  (via drill 0.3)
  Top 0.152: J29.2 77.22,128.52 78.99,130.3 78.99,138.26
  Top 0.254: L6.1 80.13,140.98 80.7,140.41 U11.3 80.7,138.34 80.77,138.26 | 95.13,102.62 95.27,102.49 98.81,102.49 100.08,103.76 100.08,132.72 98.04,134.75 86.49,134.75 82.97,138.26 81.45,138.26 | J27.2 84.34,105.4 84.07,105.66 79.97,105.66 R45.2 79.81,105.65 v78.49,105.65 Q12.1 | C36.1 78.99,138.26 80.77,138.26 | 80.77,138.26 81.45,138.26 | U11.2 81.35,138.36 81.45,138.26 | Q11.1 77.51,113.32 v77.47,113.28 | R43.2 77.43,117.39 v77.47,117.35
  Top 0.508: J27.2 84.34,103.12 84.84,102.62 95.12,102.62 95.13,102.62 J26.2
  Bottom 0.254: v78.49,105.65 78.49,105.92 77.47,106.93 v77.47,113.28 v77.47,117.35
5V  (via drill 0.3)
  Top 0.254: C6.1 17.65,37.34 v17.84,37.15 18.03,36.96 U1.1 | C6.1 17.79,38.48 19.85,38.48 | C3.1 19.98,37.68 20.32,37.34 26.67,37.34 27.18,36.83 J3.2 | v13.72,26.04 13.63,26.12 R2.2 | R6.2 v12.95,17.02 13.37,16.6 C7.1 C5.1 19.94,16.6 | R13.2 v12.95,19.56 14.74,21.34 U$19.1 | 19.94,16.6 30.95,16.6 32.38,18.03 32.38,39.75 30.99,41.15 19.56,41.15 16.64,44.07 15.11,44.07 14.8,43.76 U3.7 14.8,40.66 R1.2 16.85,38.61 17.14,38.61 17.41,38.34 C6.1 | D1.A 19.95,16.59 19.94,16.6
  Top 0.508: 19.85,38.48 C3.1
  Bottom 0.254: v17.84,37.15 18.03,36.96 18.03,27.43 16.64,26.04 v13.72,26.04 | v12.95,19.56 v12.95,17.02
5V1  (via drill 0.3)
  Top 0.254: C9.1 84.2,37.34 v84.39,37.15 84.58,36.96 U4.1 | C9.1 84.34,38.48 86.4,38.48 | C10.1 86.53,37.68 86.87,37.34 93.22,37.34 93.73,36.83 J8.2 | v80.26,26.04 80.18,26.12 R15.2 | R14.2 v79.5,17.02 79.92,16.6 C12.1 C11.1 86.49,16.6 | R10.2 v79.5,19.56 81.29,21.34 U$40.1 | 86.49,16.6 97.5,16.6 98.93,18.03 98.93,39.75 97.54,41.15 86.11,41.15 83.19,44.07 81.66,44.07 81.35,43.76 U2.7 81.35,40.66 R7.2 83.4,38.61 83.69,38.61 83.96,38.34 C9.1 | D2.A 86.5,16.59 86.49,16.6
  Top 0.508: 86.4,38.48 C10.1
  Bottom 0.254: v84.39,37.15 84.58,36.96 84.58,27.43 83.19,26.04 v80.26,26.04 | v79.5,19.56 v79.5,17.02
5V2  (via drill 0.3)
  Top 0.254: C16.1 17.65,83.57 v17.84,83.38 18.03,83.19 U6.1 | C16.1 17.79,84.71 19.85,84.71 | C17.1 19.98,83.91 20.32,83.57 26.67,83.57 27.18,83.06 J13.2 | v13.72,72.26 13.63,72.35 R23.2 | R22.2 v12.95,63.25 13.37,62.83 C19.1 C18.1 19.94,62.83 | R20.2 v12.95,65.79 14.74,67.57 U$61.1 | 19.94,62.83 30.95,62.83 32.38,64.26 32.38,85.98 30.99,87.38 19.56,87.38 16.64,90.3 15.11,90.3 14.8,89.99 U5.7 14.8,86.89 R17.2 16.85,84.84 17.14,84.84 17.41,84.57 C16.1 | D3.A 19.95,62.81 19.94,62.83
  Top 0.508: 19.85,84.71 C17.1
  Bottom 0.254: v17.84,83.38 18.03,83.19 18.03,73.66 16.64,72.26 v13.72,72.26 | v12.95,65.79 v12.95,63.25
5V3  (via drill 0.3)
  Top 0.254: C23.1 84.2,83.57 v84.39,83.38 84.58,83.19 U8.1 | C23.1 84.34,84.71 86.4,84.71 | C24.1 86.53,83.91 86.87,83.57 93.22,83.57 93.73,83.06 J18.2 | v80.26,72.26 80.18,72.35 R31.2 | R30.2 v79.5,63.25 79.92,62.83 C26.1 C25.1 86.49,62.83 | R28.2 v79.5,65.79 81.29,67.57 U$82.1 | 86.49,62.83 97.5,62.83 98.93,64.26 98.93,85.98 97.54,87.38 86.11,87.38 83.19,90.3 81.66,90.3 81.35,89.99 U7.7 81.35,86.89 R25.2 83.4,84.84 83.69,84.84 83.96,84.57 C23.1 | D4.A 86.5,62.81 86.49,62.83
  Top 0.508: 86.4,84.71 C24.1
  Bottom 0.254: v84.39,83.38 84.58,83.19 84.58,73.66 83.19,72.26 v80.26,72.26 | v79.5,65.79 v79.5,63.25
5V4  (via drill 0.3)
  Top 0.254: C30.1 17.65,129.79 v17.84,129.6 18.03,129.41 U10.1 | C30.1 17.79,130.94 19.85,130.94 | C31.1 19.98,130.14 20.32,129.79 26.67,129.79 27.18,129.29 J23.2 | v13.72,118.49 13.63,118.58 R39.2 | R38.2 v12.95,109.47 13.37,109.05 C33.1 C32.1 19.94,109.05 | R36.2 v12.95,112.01 14.74,113.8 U$103.1 | 19.94,109.05 30.95,109.05 32.38,110.49 32.38,132.21 30.99,133.6 19.56,133.6 16.64,136.53 15.11,136.53 14.8,136.22 U9.7 14.8,133.11 R33.2 16.85,131.06 17.14,131.06 17.41,130.8 C30.1 | D5.A 19.95,109.04 19.94,109.05
  Top 0.508: 19.85,130.94 C31.1
  Bottom 0.254: v17.84,129.6 18.03,129.41 18.03,119.89 16.64,118.49 v13.72,118.49 | v12.95,112.01 v12.95,109.47
5V5  (via drill 0.3)
  Top 0.254: C37.1 84.2,129.79 v84.39,129.6 84.58,129.41 U12.1 | C37.1 84.34,130.94 86.4,130.94 | C38.1 86.53,130.14 86.87,129.79 93.22,129.79 93.73,129.29 J28.2 | v80.26,118.49 80.18,118.58 R47.2 | R46.2 v79.5,109.47 79.92,109.05 C40.1 C39.1 86.49,109.05 | R44.2 v79.5,112.01 81.29,113.8 U$124.1 | 86.49,109.05 97.5,109.05 98.93,110.49 98.93,132.21 97.54,133.6 86.11,133.6 83.19,136.53 81.66,136.53 81.35,136.22 U11.7 81.35,133.11 R41.2 83.4,131.06 83.69,131.06 83.96,130.8 C37.1 | D6.A 86.5,109.04 86.49,109.05
  Top 0.508: 86.4,130.94 C38.1
  Bottom 0.254: v84.39,129.6 84.58,129.41 84.58,119.89 83.19,118.49 v80.26,118.49 | v79.5,112.01 v79.5,109.47
25KHZ_PWM
  Top 0.152: J5.2 12.45,26.67 12.45,25.91 15.5,22.85 U$19.4 20.18,22.85 21.59,24.26 21.59,29.97 22.61,30.99 U1.10
25KHZ_PWM1
  Top 0.152: J10.2 78.99,26.67 78.99,25.91 82.05,22.85 U$40.4 86.73,22.85 88.14,24.26 88.14,29.97 89.15,30.99 U4.10
25KHZ_PWM2
  Top 0.152: J15.2 12.45,72.9 12.45,72.14 15.5,69.08 U$61.4 20.18,69.08 21.59,70.48 21.59,76.2 22.61,77.22 U6.10
25KHZ_PWM3
  Top 0.152: J20.2 78.99,72.9 78.99,72.14 82.05,69.08 U$82.4 86.73,69.08 88.14,70.48 88.14,76.2 89.15,77.22 U8.10
25KHZ_PWM4
  Top 0.152: J25.2 12.45,119.13 12.45,118.36 15.5,115.31 U$103.4 20.18,115.31 20.18,115.3 21.59,116.71 21.59,122.43 22.61,123.44 U10.10
25KHZ_PWM5
  Top 0.152: J30.2 78.99,119.13 78.99,118.36 82.05,115.31 U$124.4 86.73,115.31 86.73,115.3 88.14,116.71 88.14,122.43 89.15,123.44 U12.10
!RST  (via drill 0.3)
  Top 0.152: R2.1 16.64,28.49 16.64,31.75 17.14,32.26 U1.4 v19.56,32.26
  Bottom 0.152: v19.56,32.26 24.64,27.18 27.18,27.18 J3.5
!RST1  (via drill 0.3)
  Top 0.152: R15.1 83.19,28.49 83.19,31.75 83.69,32.26 U4.4 v86.11,32.26
  Bottom 0.152: v86.11,32.26 91.19,27.18 93.73,27.18 J8.5
!RST2  (via drill 0.3)
  Top 0.152: R23.1 16.64,74.72 16.64,77.98 17.14,78.49 U6.4 v19.56,78.49
  Bottom 0.152: v19.56,78.49 24.64,73.41 27.18,73.41 J13.5
!RST3  (via drill 0.3)
  Top 0.152: R31.1 83.19,74.72 83.19,77.98 83.69,78.49 U8.4 v86.11,78.49
  Bottom 0.152: v86.11,78.49 91.19,73.41 93.73,73.41 J18.5
!RST4  (via drill 0.3)
  Top 0.152: R39.1 16.64,120.94 16.64,124.21 17.14,124.71 U10.4 v19.56,124.71
  Bottom 0.152: v19.56,124.71 24.64,119.63 27.18,119.63 J23.5
!RST5  (via drill 0.3)
  Top 0.152: R47.1 83.19,120.94 83.19,124.21 83.69,124.71 U12.4 v86.11,124.71
  Bottom 0.152: v86.11,124.71 91.19,119.63 93.73,119.63 J28.5
CIPO  (via drill 0.3)
  Top 0.152: U1.8 v25.27,28.45
  Bottom 0.152: v25.27,28.45 25.27,32.89 25.91,33.53 28.45,33.53 J3.1
CIPO1  (via drill 0.3)
  Top 0.152: U4.8 v91.82,28.45
  Bottom 0.152: v91.82,28.45 91.82,32.89 92.46,33.53 95,33.53 J8.1
CIPO2  (via drill 0.3)
  Top 0.152: U6.8 v25.27,74.68
  Bottom 0.152: v25.27,74.68 25.27,79.12 25.91,79.76 28.45,79.76 J13.1
CIPO3  (via drill 0.3)
  Top 0.152: U8.8 v91.82,74.68
  Bottom 0.152: v91.82,74.68 91.82,79.12 92.46,79.76 95,79.76 J18.1
CIPO4  (via drill 0.3)
  Top 0.152: U10.8 v25.27,120.9
  Bottom 0.152: v25.27,120.9 25.27,125.35 25.91,125.98 28.45,125.98 J23.1
CIPO5  (via drill 0.3)
  Top 0.152: U12.8 v91.82,120.9
  Bottom 0.152: v91.82,120.9 91.82,125.35 92.46,125.98 95,125.98 J28.1
FAN_TACH  (via drill 0.3)
  Top 0.152: J5.1 10.03,28.45 11.94,26.54 11.94,22.61 v12.7,21.85 U$19.2 | U1.6 v19.43,29.72
  Bottom 0.152: v19.43,29.72 18.49,28.78 18.49,27.17 13.17,21.85 v12.7,21.85
FAN_TACH1  (via drill 0.3)
  Top 0.152: J10.1 76.58,28.45 78.49,26.54 78.49,22.61 v79.24,21.85 U$40.2 | U4.6 v85.98,29.72
  Bottom 0.152: v85.98,29.72 85.04,28.78 85.04,27.17 79.72,21.85 v79.24,21.85
FAN_TACH2  (via drill 0.3)
  Top 0.152: J15.1 10.03,74.68 11.94,72.77 11.94,68.83 v12.7,68.08 U$61.2 | U6.6 v19.43,75.95
  Bottom 0.152: v19.43,75.95 18.49,75.01 18.49,73.4 13.17,68.08 v12.7,68.08
FAN_TACH3  (via drill 0.3)
  Top 0.152: J20.1 76.58,74.68 78.49,72.77 78.49,68.83 v79.24,68.08 U$82.2 | U8.6 v85.98,75.95
  Bottom 0.152: v85.98,75.95 85.04,75.01 85.04,73.4 79.72,68.08 v79.24,68.08
FAN_TACH4  (via drill 0.3)
  Top 0.152: J25.1 10.03,120.9 11.94,119 11.94,115.06 v12.7,114.3 U$103.2 | U10.6 v19.43,122.17
  Bottom 0.152: v19.43,122.17 18.49,121.23 18.49,119.62 13.17,114.3 v12.7,114.3
FAN_TACH5  (via drill 0.3)
  Top 0.152: J30.1 76.58,120.9 78.49,119 78.49,115.06 v79.24,114.3 U$124.2 | U12.6 v85.98,122.17
  Bottom 0.152: v85.98,122.17 85.04,121.23 85.04,119.62 79.72,114.3 v79.24,114.3
GND  (via drill 0.3)
  Top 0.203: 14.35,22.35 v13.08,23.62
  Top 0.254: 14.35,22.35 U$19.3 19.3,22.35 v19.56,22.1
  other vias: 20.83,11.94 22.1,11.94 23.37,11.94 24.64,11.94 25.91,11.94 9.4,44.96 9.4,43.69 10.67,42.42 10.67,41.15 19.56,39.88 20.83,39.88 22.1,39.88 11.94,34.8 11.94,33.53 11.94,32.26 11.94,30.99 19.56,36.07 19.56,34.8 19.56,33.53 20.83,33.53 22.1,33.53 22.1,34.8 20.83,34.8 20.83,36.07 22.1,36.07 14.48,11.94 15.75,11.94 15.75,10.67 14.48,10.67 13.21,10.67 27.18,15.11 28.45,15.11 29.72,15.11 30.99,14.48 22.99,7.75 24.26,7.75 22.99,9.02 24.26,9.02
  pour Top (isolate 0.305): 6.86,52.58 72.9,52.58 72.9,6.86 6.86,6.86
  pour Bottom (isolate 0.305): 6.86,52.58 6.86,6.86 72.9,6.86 72.9,52.58
GND1  (via drill 0.3)
  Top 0.203: 80.9,22.35 v79.63,23.62
  Top 0.254: 80.9,22.35 U$40.3 85.85,22.35 v86.11,22.1
  other vias: 87.38,11.94 88.65,11.94 89.92,11.94 91.19,11.94 92.46,11.94 75.95,44.96 75.95,43.69 77.22,42.42 77.22,41.15 86.11,39.88 87.38,39.88 88.65,39.88 78.49,34.8 78.49,33.53 78.49,32.26 78.49,30.99 86.11,36.07 86.11,34.8 86.11,33.53 87.38,33.53 88.65,33.53 88.65,34.8 87.38,34.8 87.38,36.07 88.65,36.07 81.03,11.94 82.3,11.94 82.3,10.67 81.03,10.67 79.76,10.67 93.73,15.11 95,15.11 96.27,15.11 97.54,14.48 89.54,7.75 90.81,7.75 89.54,9.02 90.81,9.02
  pour Top (isolate 0.305): 73.41,52.58 139.45,52.58 139.45,6.86 73.41,6.86
  pour Bottom (isolate 0.305): 73.41,52.58 73.41,6.86 139.45,6.86 139.45,52.58
GND2  (via drill 0.3)
  Top 0.203: 14.35,68.58 v13.08,69.85
  Top 0.254: 14.35,68.58 U$61.3 19.3,68.58 v19.56,68.33
  other vias: 20.83,58.17 22.1,58.17 23.37,58.17 24.64,58.17 25.91,58.17 9.4,91.19 9.4,89.92 10.67,88.65 10.67,87.38 19.56,86.11 20.83,86.11 22.1,86.11 11.94,81.03 11.94,79.76 11.94,78.49 11.94,77.22 19.56,82.3 19.56,81.03 19.56,79.76 20.83,79.76 22.1,79.76 22.1,81.03 20.83,81.03 20.83,82.3 22.1,82.3 14.48,58.17 15.75,58.17 15.75,56.9 14.48,56.9 13.21,56.9 27.18,61.34 28.45,61.34 29.72,61.34 30.99,60.71 22.99,53.97 24.26,53.97 22.99,55.24 24.26,55.24
  pour Top (isolate 0.305): 6.86,98.81 72.9,98.81 72.9,53.09 6.86,53.09
  pour Bottom (isolate 0.305): 6.86,98.81 6.86,53.09 72.9,53.09 72.9,98.81
GND3  (via drill 0.3)
  Top 0.203: 80.9,68.58 v79.63,69.85
  Top 0.254: 80.9,68.58 U$82.3 85.85,68.58 v86.11,68.33
  other vias: 87.38,58.17 88.65,58.17 89.92,58.17 91.19,58.17 92.46,58.17 75.95,91.19 75.95,89.92 77.22,88.65 77.22,87.38 86.11,86.11 87.38,86.11 88.65,86.11 78.49,81.03 78.49,79.76 78.49,78.49 78.49,77.22 86.11,82.3 86.11,81.03 86.11,79.76 87.38,79.76 88.65,79.76 88.65,81.03 87.38,81.03 87.38,82.3 88.65,82.3 81.03,58.17 82.3,58.17 82.3,56.9 81.03,56.9 79.76,56.9 93.73,61.34 95,61.34 96.27,61.34 97.54,60.71 89.54,53.97 90.81,53.97 89.54,55.24 90.81,55.24
  pour Top (isolate 0.305): 73.41,98.81 139.45,98.81 139.45,53.09 73.41,53.09
  pour Bottom (isolate 0.305): 73.41,98.81 73.41,53.09 139.45,53.09 139.45,98.81
GND4  (via drill 0.3)
  Top 0.203: 14.35,114.81 v13.08,116.08
  Top 0.254: 14.35,114.81 U$103.3 19.3,114.81 v19.56,114.55
  other vias: 20.83,104.39 22.1,104.39 23.37,104.39 24.64,104.39 25.91,104.39 9.4,137.41 9.4,136.14 10.67,134.87 10.67,133.6 19.56,132.33 20.83,132.33 22.1,132.33 11.94,127.25 11.94,125.98 11.94,124.71 11.94,123.44 19.56,128.52 19.56,127.25 19.56,125.98 20.83,125.98 22.1,125.98 22.1,127.25 20.83,127.25 20.83,128.52 22.1,128.52 14.48,104.39 15.75,104.39 15.75,103.12 14.48,103.12 13.21,103.12 27.18,107.57 28.45,107.57 29.72,107.57 30.99,106.93 22.99,100.2 24.26,100.2 22.99,101.47 24.26,101.47
  pour Top (isolate 0.305): 6.86,145.03 72.9,145.03 72.9,99.31 6.86,99.31
  pour Bottom (isolate 0.305): 6.86,145.03 6.86,99.31 72.9,99.31 72.9,145.03
GND5  (via drill 0.3)
  Top 0.203: 80.9,114.81 v79.63,116.08
  Top 0.254: 80.9,114.81 U$124.3 85.85,114.81 v86.11,114.55
  other vias: 87.38,104.39 88.65,104.39 89.92,104.39 91.19,104.39 92.46,104.39 75.95,137.41 75.95,136.14 77.22,134.87 77.22,133.6 86.11,132.33 87.38,132.33 88.65,132.33 78.49,127.25 78.49,125.98 78.49,124.71 78.49,123.44 86.11,128.52 86.11,127.25 86.11,125.98 87.38,125.98 88.65,125.98 88.65,127.25 87.38,127.25 87.38,128.52 88.65,128.52 81.03,104.39 82.3,104.39 82.3,103.12 81.03,103.12 79.76,103.12 93.73,107.57 95,107.57 96.27,107.57 97.54,106.93 89.54,100.2 90.81,100.2 89.54,101.47 90.81,101.47
  pour Top (isolate 0.305): 73.41,145.03 139.45,145.03 139.45,99.31 73.41,99.31
  pour Bottom (isolate 0.305): 73.41,145.03 73.41,99.31 139.45,99.31 139.45,145.03
HV_SCL
  Top 0.152: Q2.3 9.18,22.66 R13.1 9.18,18.63 9.4,18.41 20.57,18.41 22.1,19.94 22.1,29.21 22.61,29.72 U1.9 24.64,29.72 25.91,30.99 28.45,30.99 J3.3
HV_SCL1
  Top 0.152: Q1.3 75.73,22.66 R10.1 75.73,18.63 75.95,18.41 87.12,18.41 88.65,19.94 88.65,29.21 89.15,29.72 U4.9 91.19,29.72 92.46,30.99 95,30.99 J8.3
HV_SCL2
  Top 0.152: Q5.3 9.18,68.89 R20.1 9.18,64.86 9.4,64.64 20.57,64.64 22.1,66.17 22.1,75.44 22.61,75.95 U6.9 24.64,75.95 25.91,77.22 28.45,77.22 J13.3
HV_SCL3
  Top 0.152: Q7.3 75.73,68.89 R28.1 75.73,64.86 75.95,64.64 87.12,64.64 88.65,66.17 88.65,75.44 89.15,75.95 U8.9 91.19,75.95 92.46,77.22 95,77.22 J18.3
HV_SCL4
  Top 0.152: Q9.3 9.18,115.11 R36.1 9.18,111.09 9.4,110.87 20.57,110.87 22.1,112.4 22.1,121.67 22.61,122.17 U10.9 24.64,122.17 25.91,123.44 28.45,123.44 J23.3
HV_SCL5
  Top 0.152: Q11.3 75.73,115.11 R44.1 75.73,111.09 75.95,110.87 87.12,110.87 88.65,112.4 88.65,121.67 89.15,122.17 U12.9 91.19,122.17 92.46,123.44 95,123.44 J28.3
HV_SDA  (via drill 0.3)
  Top 0.152: Q3.3 9.11,16.94 R6.1 9.18,17.69 9.4,17.91 v13.72,17.91 | U1.7 v19.18,28.45 19.56,28.45 22.73,31.62 24.89,31.62 25.53,32.26 J3.4
  Bottom 0.152: v13.72,17.91 19.18,23.37 v19.18,28.45
HV_SDA1  (via drill 0.3)
  Top 0.152: Q4.3 75.66,16.94 R14.1 75.73,17.69 75.95,17.91 v80.26,17.91 | U4.7 v85.73,28.45 86.11,28.45 89.28,31.62 91.44,31.62 92.08,32.26 J8.4
  Bottom 0.152: v80.26,17.91 85.73,23.37 v85.73,28.45
HV_SDA2  (via drill 0.3)
  Top 0.152: Q6.3 9.11,63.17 R22.1 9.18,63.92 9.4,64.14 v13.72,64.14 | U6.7 v19.18,74.68 19.56,74.68 22.73,77.85 24.89,77.85 25.53,78.49 J13.4
  Bottom 0.152: v13.72,64.14 19.18,69.6 v19.18,74.68
HV_SDA3  (via drill 0.3)
  Top 0.152: Q8.3 75.66,63.17 R30.1 75.73,63.92 75.95,64.14 v80.26,64.14 | U8.7 v85.73,74.68 86.11,74.68 89.28,77.85 91.44,77.85 92.08,78.49 J18.4
  Bottom 0.152: v80.26,64.14 85.73,69.6 v85.73,74.68
HV_SDA4  (via drill 0.3)
  Top 0.152: Q10.3 9.11,109.4 R38.1 9.18,110.15 9.4,110.36 v13.72,110.36 | U10.7 v19.18,120.9 19.56,120.9 22.73,124.08 24.89,124.08 25.53,124.71 J23.4
  Bottom 0.152: v13.72,110.36 19.18,115.82 v19.18,120.9
HV_SDA5  (via drill 0.3)
  Top 0.152: Q12.3 75.66,109.4 R46.1 75.73,110.15 75.95,110.36 v80.26,110.36 | U12.7 v85.73,120.9 86.11,120.9 89.28,124.08 91.44,124.08 92.08,124.71 J28.4
  Bottom 0.152: v80.26,110.36 85.73,115.82 v85.73,120.9
N$1
  Top 0.152: Y2.1 13.63,32.22 C4.2 14.77,30.86 15.62,30.86 16,31.24 16,31.75 17.78,33.53 U1.3
N$2
  Top 0.254: U3.5 13.5,40.26 | 13.5,40 13.5,38.35
  Top 0.508: 13.5,40.26 R1.1 13.5,40 | 13.5,38.35 R4.2
N$3
  Top 0.254: U3.1 15.45,49.96 L1.2
N$4
  Top 0.152: Y2.3 15.33,33.57 C1.2 16,35.39 16,33.02 16.26,32.77 16.38,32.77 16.64,33.02 16.64,34.42 17.02,34.8 U1.2
N$5
  Top 0.254: D1.C R3.2
N$6
  Top 0.254: U2.5 80.05,40.26 | 80.05,40 80.05,38.35
  Top 0.508: 80.05,40.26 R7.1 80.05,40 | 80.05,38.35 R8.2
N$7
  Top 0.254: U2.1 82,49.96 L2.2
N$8
  Top 0.152: Y1.1 80.18,32.22 C14.2 81.32,30.86 82.17,30.86 82.55,31.24 82.55,31.75 84.33,33.53 U4.3
N$9
  Top 0.152: Y1.3 81.88,33.57 C13.2 82.55,35.39 82.55,33.02 82.8,32.77 82.93,32.77 83.19,33.02 83.19,34.42 83.57,34.8 U4.2
N$10
  Top 0.254: D2.C R16.2
N$11
  Top 0.254: U5.5 13.5,86.48 | 13.5,86.23 13.5,84.58
  Top 0.508: 13.5,86.48 R17.1 13.5,86.23 | 13.5,84.58 R18.2
N$12
  Top 0.254: U5.1 15.45,96.19 L3.2
N$13
  Top 0.152: Y3.1 13.63,78.45 C21.2 14.77,77.09 15.62,77.09 16,77.47 16,77.98 17.78,79.76 U6.3
N$14
  Top 0.152: Y3.3 15.33,79.8 C20.2 16,81.62 16,79.25 16.26,78.99 16.38,78.99 16.64,79.25 16.64,80.65 17.02,81.03 U6.2
N$15
  Top 0.254: D3.C R24.2
N$16
  Top 0.254: U7.5 80.05,86.48 | 80.05,86.23 80.05,84.58
  Top 0.508: 80.05,86.48 R25.1 80.05,86.23 | 80.05,84.58 R26.2
N$17
  Top 0.254: U7.1 82,96.19 L4.2
N$18
  Top 0.152: Y4.1 80.18,78.45 C28.2 81.32,77.09 82.17,77.09 82.55,77.47 82.55,77.98 84.33,79.76 U8.3
N$19
  Top 0.152: Y4.3 81.88,79.8 C27.2 82.55,81.62 82.55,79.25 82.8,78.99 82.93,78.99 83.19,79.25 83.19,80.65 83.57,81.03 U8.2
N$20
  Top 0.254: D4.C R32.2
N$21
  Top 0.254: U9.5 13.5,132.71 | 13.5,132.46 13.5,130.81
  Top 0.508: 13.5,132.71 R33.1 13.5,132.46 | 13.5,130.81 R34.2
N$22
  Top 0.254: U9.1 15.45,142.42 L5.2
N$23
  Top 0.152: Y5.1 13.63,124.67 C35.2 14.77,123.32 15.62,123.32 16,123.7 16,124.21 17.78,125.98 U10.3
N$24
  Top 0.152: Y5.3 15.33,126.02 C34.2 16,127.85 16,125.48 16.26,125.22 16.38,125.22 16.64,125.48 16.64,126.87 17.02,127.25 U10.2
N$25
  Top 0.254: D5.C R40.2
N$26
  Top 0.254: U11.5 80.05,132.71 | 80.05,132.46 80.05,130.81
  Top 0.508: 80.05,132.71 R41.1 80.05,132.46 | 80.05,130.81 R42.2
N$27
  Top 0.254: U11.1 82,142.42 L6.2
N$28
  Top 0.152: Y6.1 80.18,124.67 C42.2 81.32,123.32 82.17,123.32 82.55,123.7 82.55,124.21 84.33,125.98 U12.3
N$29
  Top 0.152: Y6.3 81.88,126.02 C41.2 82.55,127.85 82.55,125.48 82.8,125.22 82.93,125.22 83.19,125.48 83.19,126.87 83.57,127.25 U12.2
N$30
  Top 0.254: D6.C R48.2
SCL  (via drill 0.3)
  Top 0.152: v19.81,13.21 19.81,11.96 J2.4 | J1.4 30.58,13.18 v30.61,13.21 | Q2.2 10.94,23.37 10.16,23.37 9.18,24.34 R11.1 9.18,26.71 9.65,27.18 v10.03,27.18
  Bottom 0.152: v30.61,13.21 v19.81,13.21 14.48,13.21 13.21,11.94 8.89,11.94 7.62,13.21 7.62,25.91 8.89,27.18 v10.03,27.18 10.03,39.24 J4.4
SCL1  (via drill 0.3)
  Top 0.152: v86.36,13.21 86.36,11.96 J7.4 | J6.4 97.13,13.18 v97.16,13.21 | Q1.2 77.49,23.37 76.71,23.37 75.73,24.34 R9.1 75.73,26.71 76.2,27.18 v76.58,27.18
  Bottom 0.152: v97.16,13.21 v86.36,13.21 81.03,13.21 79.76,11.94 75.44,11.94 74.17,13.21 74.17,25.91 75.44,27.18 v76.58,27.18 76.58,39.24 J9.4
SCL2  (via drill 0.3)
  Top 0.152: v19.81,59.44 19.81,58.19 J12.4 | J11.4 30.58,59.41 v30.61,59.44 | Q5.2 10.94,69.6 10.16,69.6 9.18,70.57 R19.1 9.18,72.94 9.65,73.41 v10.03,73.41
  Bottom 0.152: v30.61,59.44 v19.81,59.44 14.48,59.44 13.21,58.17 8.89,58.17 7.62,59.44 7.62,72.14 8.89,73.41 v10.03,73.41 10.03,85.47 J14.4
SCL3  (via drill 0.3)
  Top 0.152: v86.36,59.44 86.36,58.19 J17.4 | J16.4 97.13,59.41 v97.16,59.44 | Q7.2 77.49,69.6 76.71,69.6 75.73,70.57 R27.1 75.73,72.94 76.2,73.41 v76.58,73.41
  Bottom 0.152: v97.16,59.44 v86.36,59.44 81.03,59.44 79.76,58.17 75.44,58.17 74.17,59.44 74.17,72.14 75.44,73.41 v76.58,73.41 76.58,85.47 J19.4
SCL4  (via drill 0.3)
  Top 0.152: v19.81,105.66 19.81,104.42 J22.4 | J21.4 30.58,105.64 v30.61,105.66 | Q9.2 10.94,115.82 10.16,115.82 9.18,116.8 R35.1 9.18,119.17 9.65,119.63 v10.03,119.63
  Bottom 0.152: v30.61,105.66 v19.81,105.66 14.48,105.66 13.21,104.39 8.89,104.39 7.62,105.66 7.62,118.36 8.89,119.63 v10.03,119.63 10.03,131.7 J24.4
SCL5  (via drill 0.3)
  Top 0.152: v86.36,105.66 86.36,104.42 J27.4 | J26.4 97.13,105.64 v97.16,105.66 | Q11.2 77.49,115.82 76.71,115.82 75.73,116.8 R43.1 75.73,119.17 76.2,119.63 v76.58,119.63
  Bottom 0.152: v97.16,105.66 v86.36,105.66 81.03,105.66 79.76,104.39 75.44,104.39 74.17,105.66 74.17,118.36 75.44,119.63 v76.58,119.63 76.58,131.7 J29.4
SDA  (via drill 0.3)
  Top 0.152: Q3.2 10.97,14.48 v11.94,14.48 12.99,14.48 R5.1 14.31,13.84 18.8,13.84 | 18.8,13.84 J2.3 | J1.3 29.58,13.47 29.21,13.84 18.8,13.84 | v10.67,38.61 J4.3
  Bottom 0.152: v11.94,14.48 11.94,28.45 10.67,29.72 v10.67,38.61
SDA1  (via drill 0.3)
  Top 0.152: Q4.2 77.52,14.48 v78.49,14.48 79.54,14.48 R12.1 80.86,13.84 85.34,13.84 | 85.34,13.84 J7.3 | J6.3 96.13,13.47 95.76,13.84 85.34,13.84 | v77.22,38.61 J9.3
  Bottom 0.152: v78.49,14.48 78.49,28.45 77.22,29.72 v77.22,38.61
SDA2  (via drill 0.3)
  Top 0.152: Q6.2 10.97,60.71 v11.94,60.71 12.99,60.71 R21.1 14.31,60.07 18.8,60.07 | 18.8,60.07 J12.3 | J11.3 29.58,59.7 29.21,60.07 18.8,60.07 | v10.67,84.84 J14.3
  Bottom 0.152: v11.94,60.71 11.94,74.68 10.67,75.95 v10.67,84.84
SDA3  (via drill 0.3)
  Top 0.152: Q8.2 77.52,60.71 v78.49,60.71 79.54,60.71 R29.1 80.86,60.07 85.34,60.07 | 85.34,60.07 J17.3 | J16.3 96.13,59.7 95.76,60.07 85.34,60.07 | v77.22,84.84 J19.3
  Bottom 0.152: v78.49,60.71 78.49,74.68 77.22,75.95 v77.22,84.84
SDA4  (via drill 0.3)
  Top 0.152: Q10.2 10.97,106.93 v11.94,106.93 12.99,106.93 R37.1 14.31,106.3 18.8,106.3 | 18.8,106.3 J22.3 | J21.3 29.58,105.93 29.21,106.3 18.8,106.3 | v10.67,131.06 J24.3
  Bottom 0.152: v11.94,106.93 11.94,120.9 10.67,122.17 v10.67,131.06
SDA5  (via drill 0.3)
  Top 0.152: Q12.2 77.52,106.93 v78.49,106.93 79.54,106.93 R45.1 80.86,106.3 85.34,106.3 | 85.34,106.3 J27.3 | J26.3 96.13,105.93 95.76,106.3 85.34,106.3 | v77.22,131.06 J29.3
  Bottom 0.152: v78.49,106.93 78.49,120.9 77.22,122.17 v77.22,131.06

## Text on the board
Top: x01 | x01 | x01 | x01 | x01 | x01
Milling: v-score | v-score | v-score | v-score | v-score | v-score | v-score